# Altium PCB AntennaPCB.PcbDoc
Units mm, origin at the board's own origin, x right, y up, seen from the top; angles counter-clockwise.
Board outline 70 x 70 mm, 4 copper layers (Top Layer, Int1 (GND), Int2 (PWR), Bottom Layer), stack 1.369 mm thick; 20 components, 9 nets, 59 pads, 345 vias.
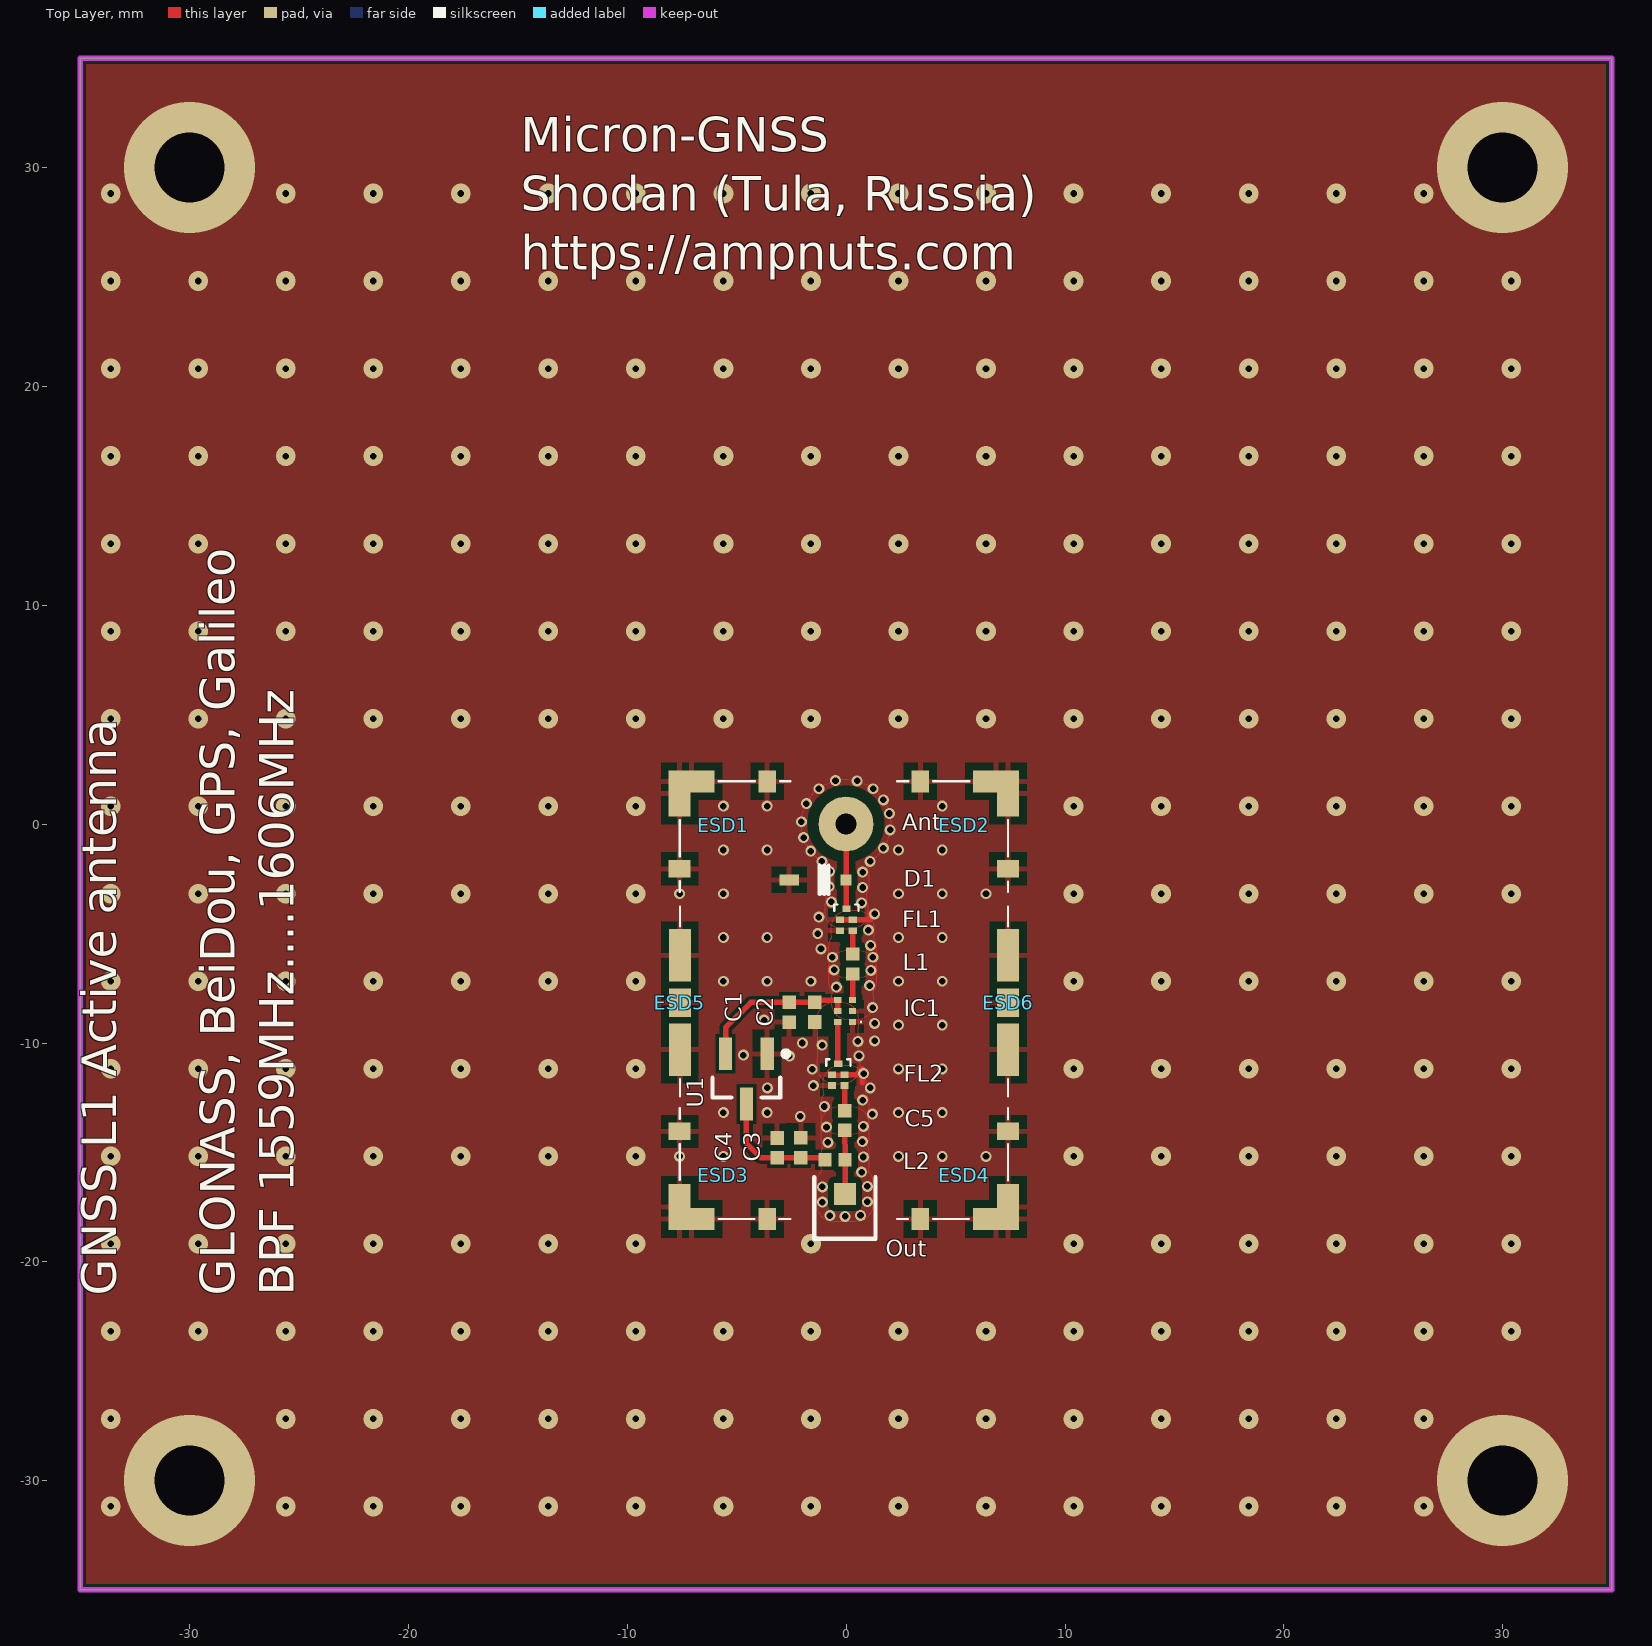
[diagram p0: Top Layer view]
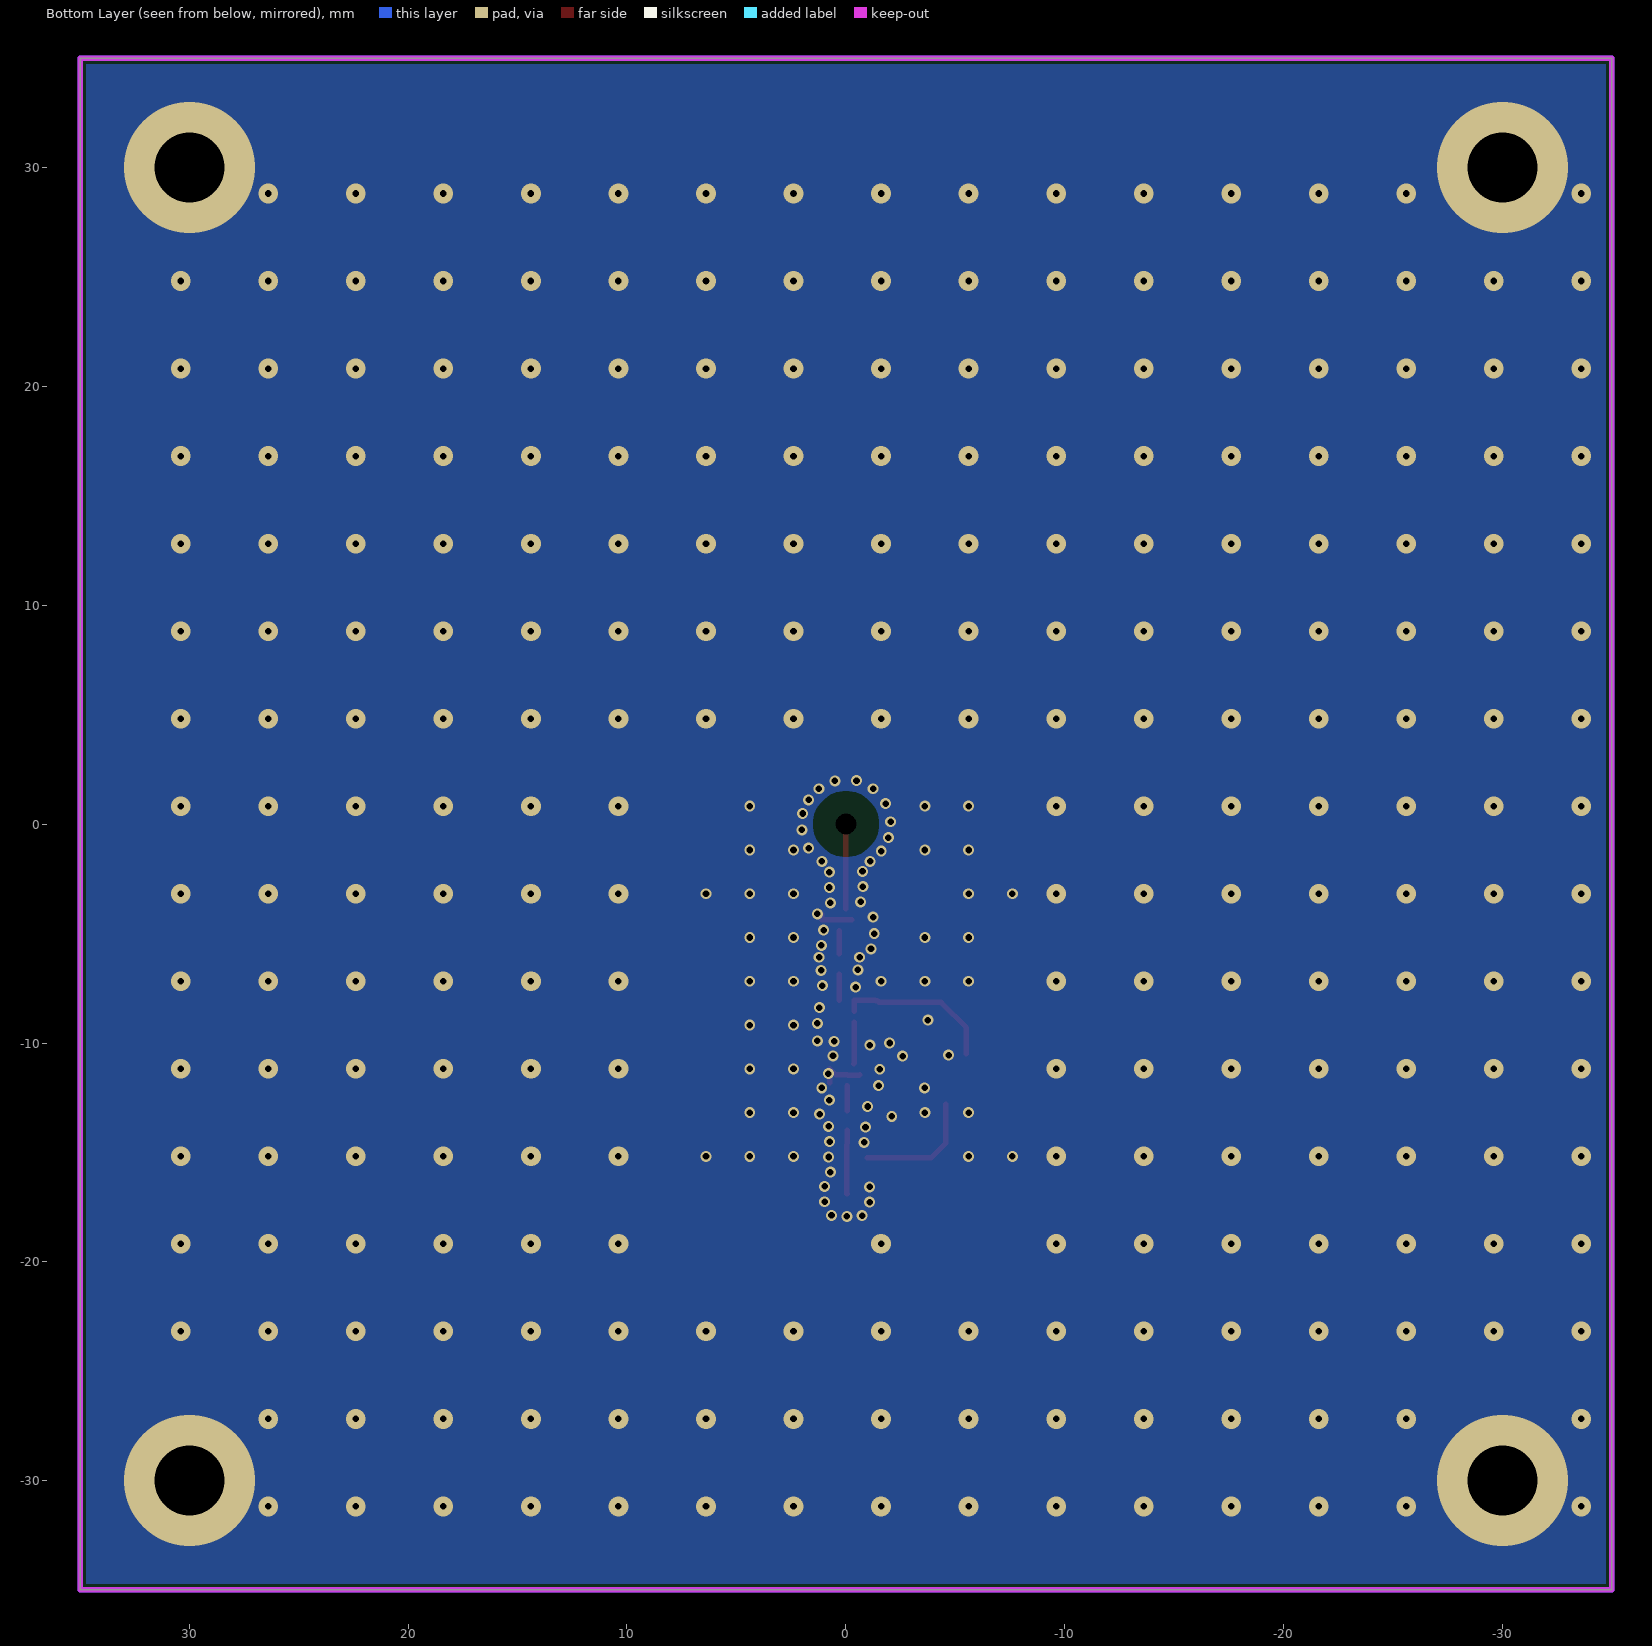
[diagram p1: Bottom Layer view, seen from below]
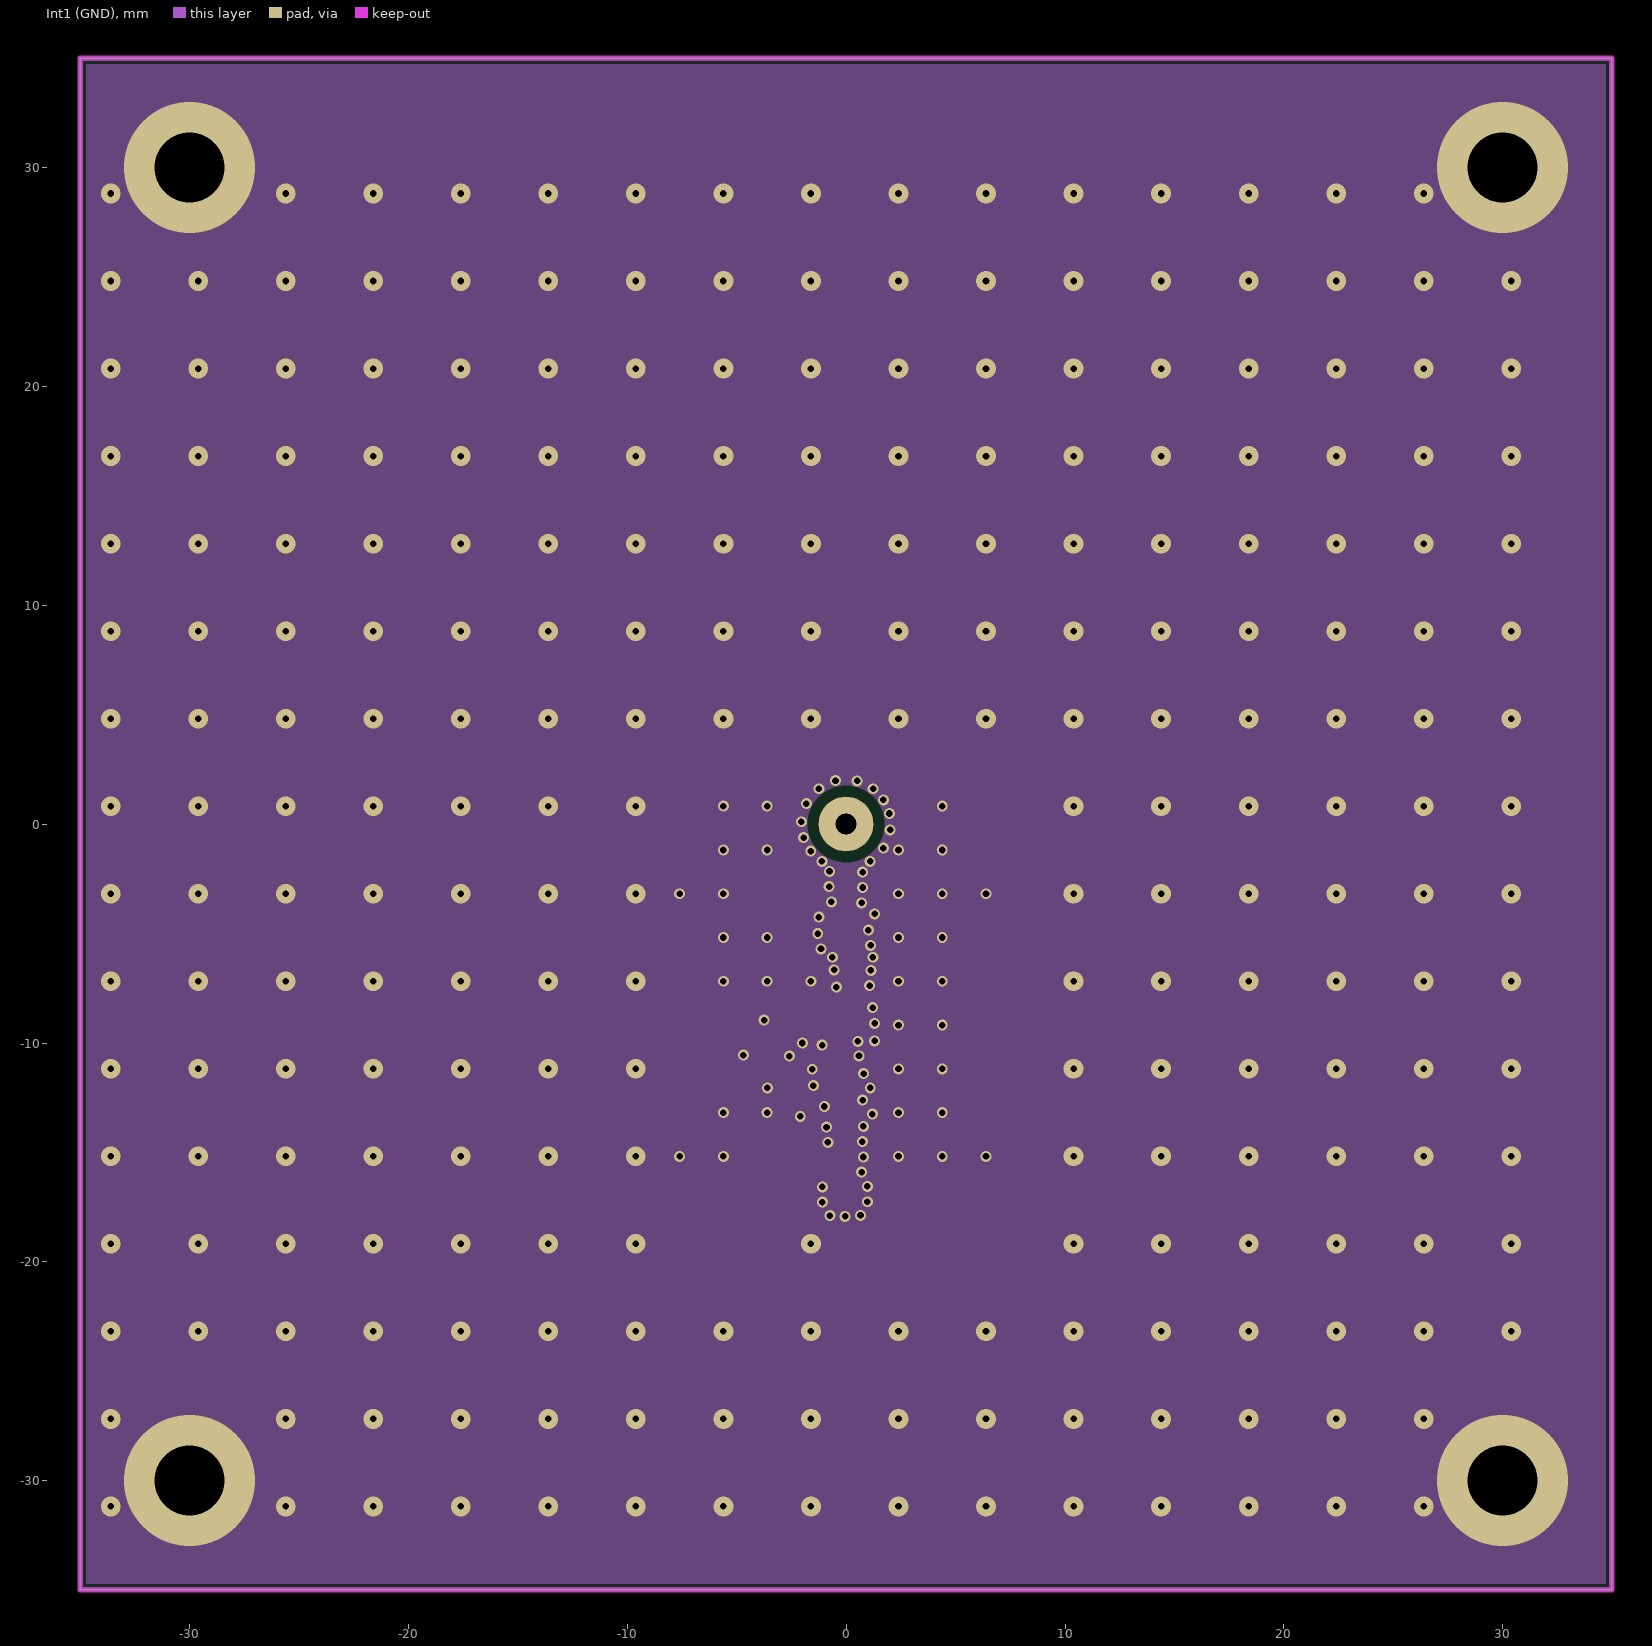
[diagram p2: Int1 (GND)]
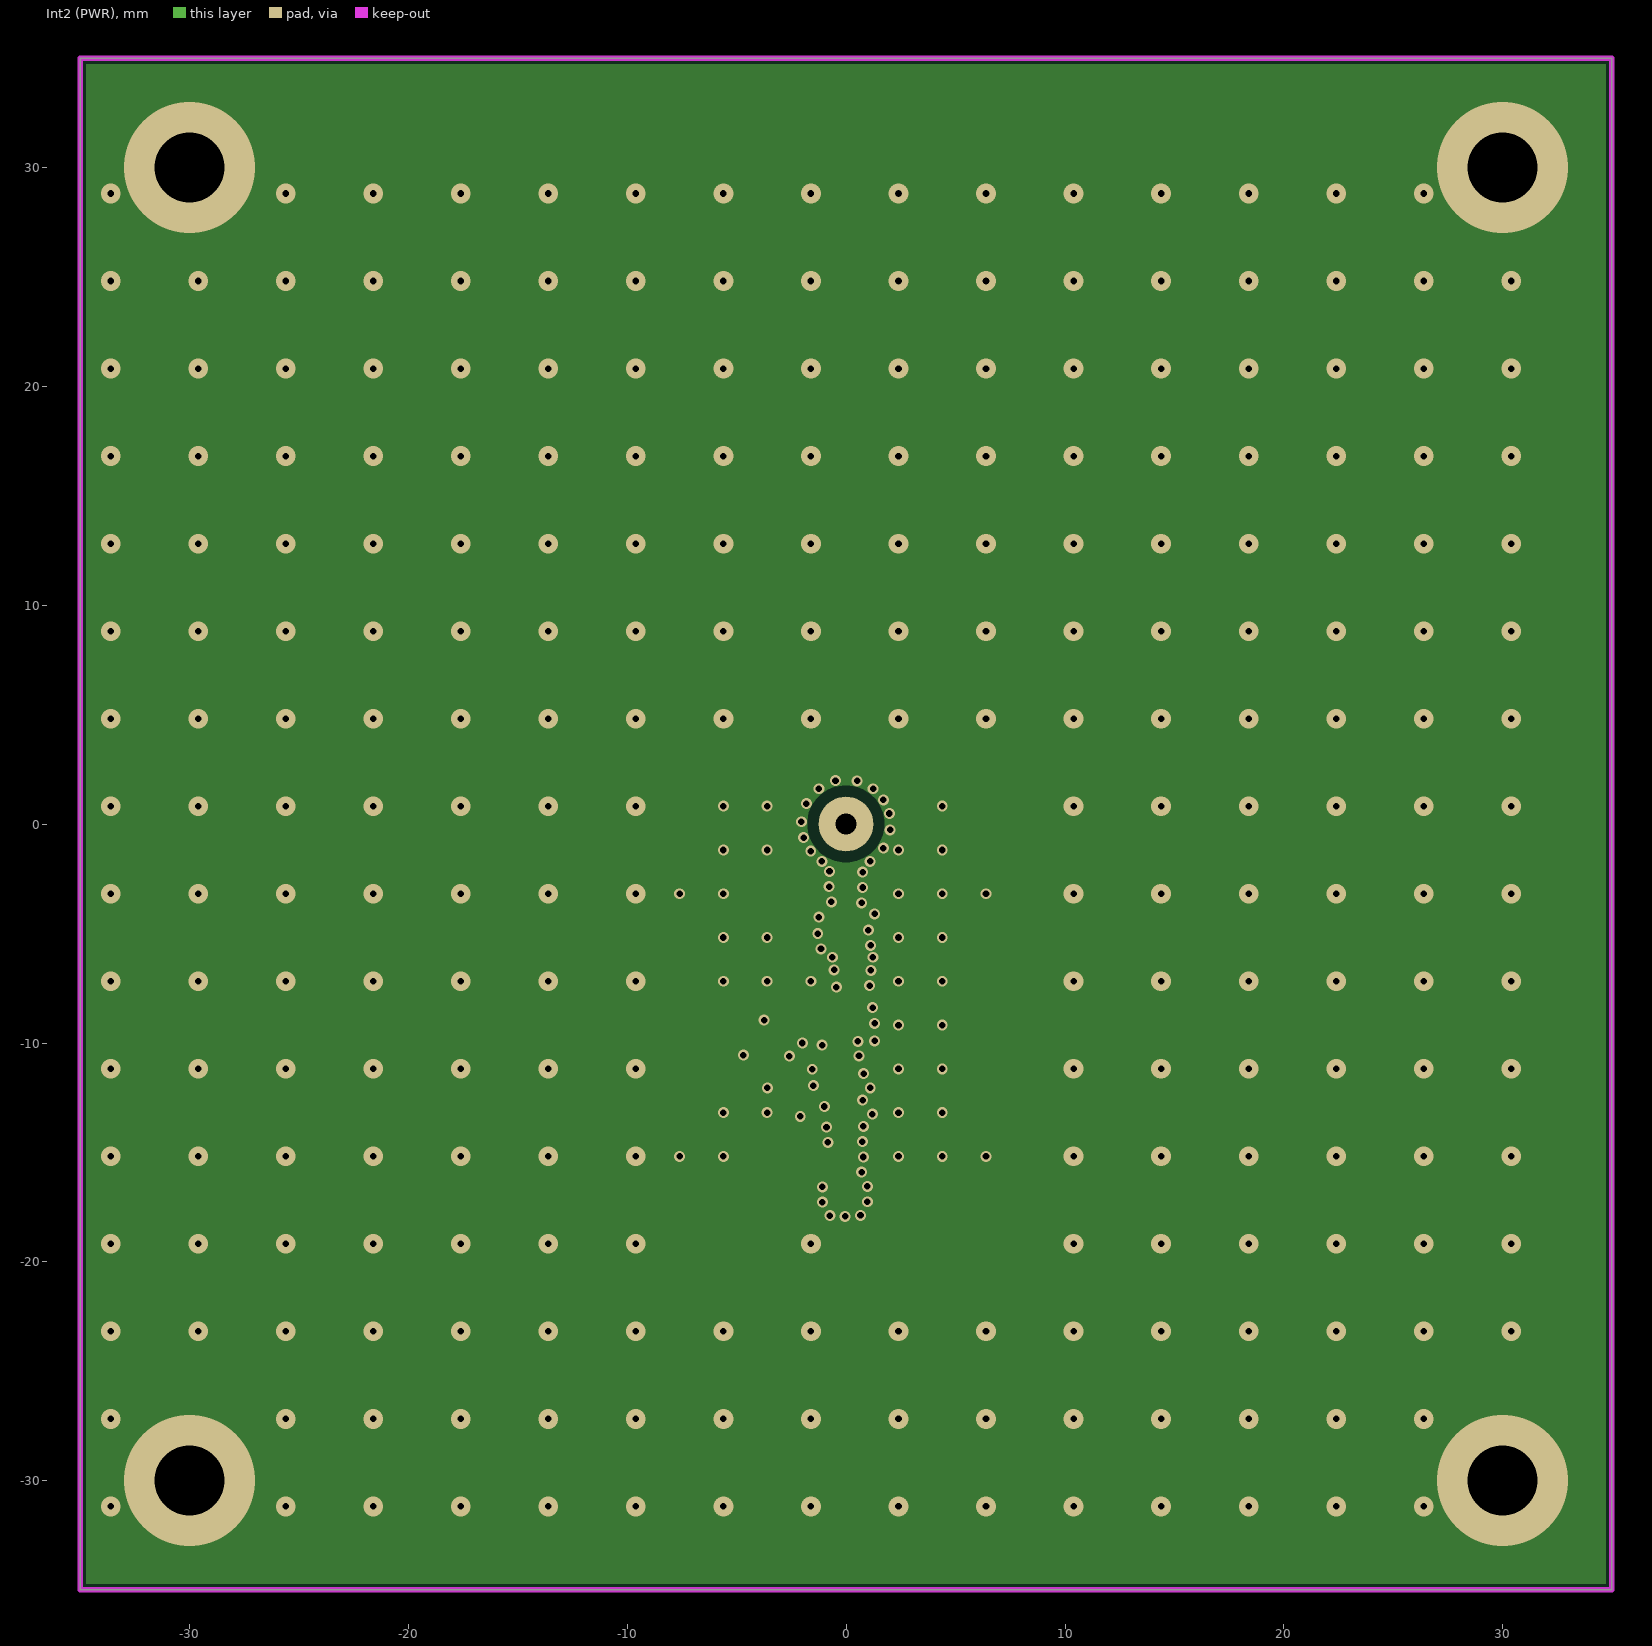
[diagram p3: Int2 (PWR)]
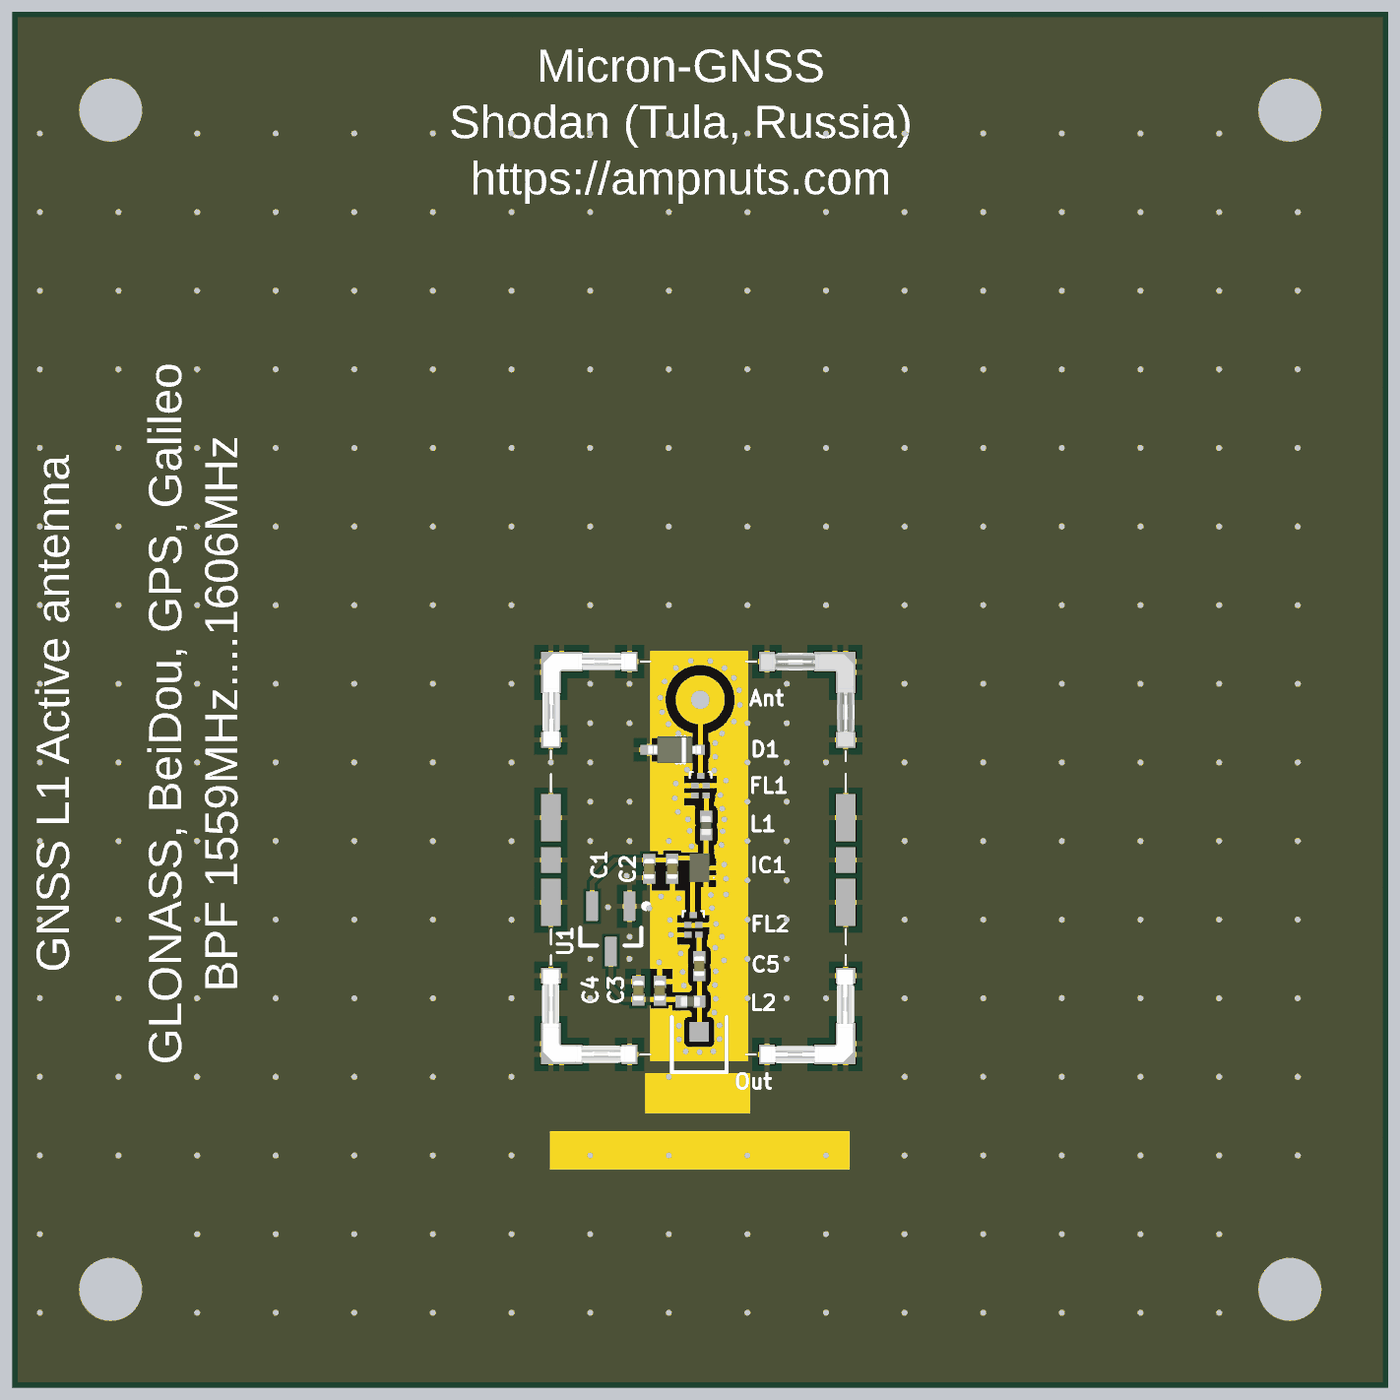
[diagram p4: 3D render of the assembled board from above, using the file's embedded part models]

## Layer stack, top to bottom
Top Solder: solder mask 0.0254, SM-001, Dk 4
Top Layer: signal copper 0.035
Dielectric 1: prepreg 0.1295, PP-017, Dk 4.3
Dielectric 2: prepreg 0.1295, PP-017, Dk 4.3
Int1 (GND): signal copper 0.035
Dielectric 3: core 0.7112, Core-039, Dk 4.8
Int2 (PWR): signal copper 0.035
Dielectric 4: prepreg 0.1295, PP-017, Dk 4.3
Dielectric 5: prepreg 0.1295, PP-017, Dk 4.3
Bottom Layer: signal copper 0.035
Bottom Solder: solder mask 0.0254, SM-001, Dk 4

## Board outline
-35.008,-34.991 -35.008,35.008 34.992,35.008 34.992,-34.991

## Design rules (kind name [scope] priority, off if disabled: settings)
Clearance [All] p1: gap=0.15 ignorepadtopadclearanceinfootprint=FALSE
HoleSize [All] p1: absolutevalues=TRUE maxlimit=4.54 minlimit=0.3 maxpercent=80.000 minpercent=20.000
HoleToHoleClearance [All] p1: gap=0.2 allowstackedmicrovias=TRUE
PolygonConnect [All] p1: thpad.connectstyle=Direct thpad.reliefconductorwidth=0.25 thpad.reliefentries=4 thpad.polygonreliefangle="90 Angle" thpad.airgapwidth=0.35 smdpad.connectstyle=Relief smdpad.reliefconductorwidth=0.25 smdpad.reliefentries=4 smdpad.polygonreliefangle="90 Angle" smdpad.airgapwidth=0.35 via.connectstyle=Direct via.reliefconductorwidth=0.25 via.reliefentries=4 via.polygonreliefangle="90 Angle" via.airgapwidth=0.35
RoutingVias [All] p1: holewidth=0.711 width=1.27 viastyle="Through Hole" minholewidth=0.711 minwidth=1.27 maxholewidth=0.711 maxwidth=1.27
SilkToSilkClearance [All] p1: silktosilkclearance=0.1
SilkToSolderMaskClearance [IsPad] p1: minsilkscreentomaskgap=0.1 clearancetoexposedcopper=TRUE
SolderMaskExpansion [All] p1: expansion=0.05 istentingtop=FALSE
Width [All] p1: maxlimit=0.3 minlimit=0.2 preferedwidth=0.25
26 further rules are at their usual default settings.

## Components (designator, comment, footprint, x,y, rotation, side; value= is the part's Value field where it differs from the comment)
Ant "Taoglas CGGBP.35.2.A.08 (35x35x2mm)" PIN1#1 -0.135,-0.881 r0 top
C1 "1uF" CAPC1005X55N -2.608,-8.592 r90 top
C2 "1nF" CAPC1005X55N -1.432,-8.591 r90 top
C3 "1uF" CAPC1005X55N -2.071,-14.788 r270 top
C4 "1nF" CAPC1005X55N -3.158,-14.792 r270 top
C5 "22pF" CAPC1005X55N -0.058,-13.542 r270 top
D1 "ESD9R3.3S" SOD2512X110N -1.308,-2.542 r180 top
ESD1 "Harwin Clips" "HARWIN - S0981-46R - CLIP" -8.109,2.458 r270 top locked
ESD2 "Harwin Clips" "HARWIN - S0981-46R - CLIP" 7.892,2.458 r180 top locked
ESD3 "Harwin Clips" "HARWIN - S0981-46R - CLIP" -8.108,-18.542 r0 top locked
ESD4 "Harwin Clips" "HARWIN - S0981-46R - CLIP" 7.892,-18.542 r90 top locked
ESD5 "Harwin Clips" "HARWIN - S0991-46R - CLIP" -7.6,-8.15 r90 top
ESD6 "Harwin Clips" "HARWIN - S0991-46R - CLIP" 7.4,-8.15 r90 top
FL1 "B39162B4327P810" B39921B4344P810 0.009,-4.365 r270 top
FL2 "B39162B4327P810" B39921B4344P810 -0.358,-11.442 r270 top
IC1 "BGU7005,115" SL3S1013FTB0115 -0.046,-8.541 r90 top
L1 "5.6nH" INDC1005X55N 0.292,-6.392 r270 top
L2 "1uH" INDC1005X55N -0.508,-15.342 r180 top
Out "direct cable soldering" PIN1#2 -0.058,-17.542 r0 top
U1 "MCP1702T-2502E/CB" SOT-23A-CB3_N -4.558,-11.642 r270 top

## Footprints (in the part's own frame and the unit in brackets; to place one, negate y for a bottom-side part, rotate by r counter-clockwise, add the part's x,y. Pads: shape width x height; smd on the part's side, far side on the other; paste and mask are expansions set on the pad)
B39921B4344P810 [mm]
  rect 0.3x0.375 smd mask+0.05: 1(-0.5,0) 2(0,-0.287) 3(0.5,-0.287) 4(0.5,0.287) 5(0,0.287)
  silkscreen extent -0.7,-0.55 -0.4,0.55
CAPC1005X55N [mm] "Chip Capacitor, Body 1.0x0.55mm, IPC Medium Density"
  rect 0.62x0.62 smd: 1(-0.45,0) 2(0.45,0)
  body extent -0.52,-0.27 0.53,0.28, height 0.55
"HARWIN - S0981-46R - CLIP" [mm]
  rect 1x0.8 smd: 1(0.5,4.5)
  rect 1x2.1 smd: 1(0.5,1.05)
  rect 2.1x1 smd: 1(1.05,0.5)
  rect 0.8x1 smd: 1(4.5,0.5)
  silkscreen extent 0.5,0.5 5.56,5.56, body extent 0.05,0.07 4.81,4.83, height 1.35
"HARWIN - S0991-46R - CLIP" [mm]
  rect 2.4x1 smd: 1(-2.15,0) 1(2.15,0)
  rect 1.3x1 smd: 1(0,0)
  silkscreen extent -4.29,0 4.38,0, body extent -3.24,-0.4 3.26,0.4, height 1.28
INDC1005X55N [mm] "Chip Inductor, 2-Leads, EIA 0402, Metric 1005, Body 1x0.5mm, 0402IPC Medium Density"
  rect 0.6x0.62 smd: 1(-0.46,0) 2(0.46,0)
  body extent -0.52,-0.27 0.53,0.28, height 0.55
PIN1#1 [mm] "Generic Antenna; 1 Lead"
  round 2.5 / inner round 2.5 / far side round 0 hole 0.95: 1(0.127,0.889)
PIN1#2 [mm] "Connector; Plug"
  rect 1x1 smd: 1(0,0.65)
  silkscreen extent -1.4,-1.4 1.4,1.4
SL3S1013FTB0115 [mm]
  rect 0.27x0.325 smd: 1(-0.5,-0.338) 2(0,-0.338) 3(0.5,-0.338) 4(0.5,0.338) 5(0,0.338) 6(-0.5,0.338)
  silkscreen extent -0.52,-0.75 -0.48,-0.7, body extent -0.72,-0.5 0.72,0.5, height 0.6
SOD2512X110N [mm] "Small Outline Diode Flat Lead (SOD-323), 1.70mm W X 1.25mm L X 1.10mm H body,  IPC Medium Density"
  rect 0.5x0.5 smd: 1(-1.3,0)
  rect 0.9x0.5 smd: 2(1.3,0)
  silkscreen extent -0.5,-0.65 -0.1,0.65, body extent -1.35,-0.67 1.35,0.68, height 1.1
SOT-23A-CB3_N [mm] "SOT346, 3-Leads, Body 2.9x1.5mm, Pitch 0.95mm, Lead Span 2.6mm, IPC Medium Density"
  rect 1.5x0.6 smd: 1(-1.15,0.95) 2(-1.15,-0.95) 3(1.15,0)
  silkscreen extent -1.27,-1.55 0.85,1.93, body extent -0.85,-1.55 0.85,1.55, height 1.45

## Part data
Ant: library part Antenna, "Generic Antenna", LatestRevisionDate=17-Jul-2002, LatestRevisionNote="Re-released for DXP Platform.", PackageReference=PIN1, Published=24-Mar-1999, Publisher="Altium Limited"
C1 C2 C3 C4 C5: library part CC0402_10NF_50V_10%_X7R, "Non-polarised capacitor", Case=0402, Manufacturer=GENERIC, Manufacturer1 ComponentHeight=0.55mm, Manufacturer1 Example=MURATA, Manufacturer1 Part Number=GRM155R71H103KA88D, Tolerance=±10%, Voltage=50V, Author="CERN DEM MR", Component Type=Standard, CreateDate=08.01.2016, HelpURL=\\cern.ch\dfs\Applications\Altium\Datasheets\CC0402_X7R_MURATA_GRM.pdf, LatestRevisionDate=08.01.2016, Manufacturer Part Number=CC0402_10NF_50V_10%_X7R, Mounted=Yes, Part Description="SMD Multilayer Chip Ceramic Capacitor", Part Number=CC0402_10NF_50V_10%_X7R, Pin Count=2, Sense=No, SMD=Yes, Socket=No, Status=None, TC=X7R
D1: library part PESD5V0S1UA, "Transient Voltage Suppressor Diode (Uni-Directional)", Case=SOD323, Manufacturer="NXP SEMICONDUCTORS", Power=890W, Voltage=5V, Author="CERN DEM JLC", Bonding=No, Component Type=Standard, ComponentHeight=1.1mm, CreateDate=28.08.2012, Device=ESD9R3.3S, HelpURL=\\cern.ch\dfs\Applications\Altium\Datasheets\PESD5V0S1UA.pdf, LatestRevisionDate=18.09.2013, Manufacturer Part Number=PESD5V0S1UA, Mounted=Yes, PackageDescription="Small Outline Diode Flat Lead (SOD-323), 1.70mm W X 1.25mm L X 1.10mm H body,  IPC Medium Density", Part Description="Unidirectional ESD Protection for Transient Voltage Suppression", Part Number=PESD5V0S1UA, Pin Count=2, PressFit=No, Sense=No, SMD=Yes, Socket=No
FL1 FL2: "Filter", Manufacturer_Name=TDK, Mouser Part Number=N/A, Datasheet Link=https://static6.arrow.com/aropdfconversion/457160cdcba5f1770f035cca3bb9ee2755d7a371/171b4327.pdf, Manufacturer_Part_Number=B39162B4327P810, Mouser Price/Stock=https://www.mouser.co.uk/ProductDetail/TDK/B39162B4327P810?qs=hUXy7GzqLWzEDXeMvC1aGg%3D%3D
IC1: "Integrated Circuit", Manufacturer_Name=NXP, Mouser Part Number=771-BGU7005115, Arrow Part Number=BGU7005,115, Arrow Price/Stock=https://www.arrow.com/en/products/bgu7005115/nxp-semiconductors, Datasheet Link=http://www.nxp.com/docs/en/data-sheet/BGU7005.pdf, Height=0.5mm, Manufacturer_Part_Number=BGU7005,115, Mouser Price/Stock=https://www.mouser.co.uk/ProductDetail/NXP-Semiconductors/BGU7005115?qs=2NzsBjR%252BRRlSWzh3ohfbQQ%3D%3D
L1 L2: library part IND0402_MURATA_BLM15HD601SN1, "Inductor", Case=0402, Manufacturer=MURATA, Manufacturer Part Number=BLM15HD601SN1D, Power=300mA, Resistance=0.85R, Tolerance=±25%, Author="CERN DEM JLC", Component Type=Standard, ComponentHeight=0.55mm, CreateDate=28.02.2012, HelpURL=\\cern.ch\dfs\Applications\Altium\Datasheets\IND0402_MURATA_BLM15H.pdf, LatestRevisionDate=28.02.2012, Mounted=Yes, Part Description="SMD EMIFIL Suppression Chip Ferrite Bead", Part Number=IND0402_MURATA_BLM15HD601SN1, Pin Count=2, Sense=No, SMD=Yes, Socket=No, Status=None
Out: library part Socket, LatestRevisionDate=17-Jul-2002, LatestRevisionNote="Re-released for DXP Platform.", Publisher="Altium Limited"
U1: "250 mA Low Quiescent Current LDO Regulator, 3-Pin SOT-23A, Extended Temperature, Tape and Reel", Supplier Part Number 1=MCP1702T-2502E/CBTR-ND, ComponentLink1Description=Datasheet, ComponentLink1URL=http://ww1.microchip.com/downloads/en/DeviceDoc/22008d.pdf, ComponentLink2Description="Packaging Specification", ComponentLink2URL=http://www.microchip.com/stellent/groups/techpub_sg/documents/packagingspec/en012702.pdf, ComponentLink3Description="Microchip.com Home", ComponentLink3URL=http://www.microchip.com/, DatasheetVersion="revD, Jun-2009", LatestRevisionDate=02-Dec-2009, LatestRevisionNote="Updated to datasheet revision D, Jun-2009", PackageDescription="3-Lead Plastic Small Outline Transistor (CB) [SOT-23A]", PackageReference=SOT-23A-CB3, PackageVersion="revBB, Aug-2009", Published=29-Jan-2009, Publisher="Altium Limited", Supplier 1=Digi-Key, Supplier 2=Digi-Key, Supplier 3=Digi-Key, Supplier 4=Farnell, Supplier Part Number 2=MCP1702T-2502E/CBCT-ND, Supplier Part Number 3=MCP1702T-2502E/CBDKR-ND, Supplier Part Number 4=1627173
ESD1 ESD2 ESD3 ESD4 ESD5 ESD6: Order=S0981-46R

## Via types
v1: diameter 0.9, hole 0.3, Top Layer to Bottom Layer, tented both sides, 243 vias
v2: diameter 0.5, hole 0.3, Top Layer to Bottom Layer, tented bottom, 60 vias
v3: diameter 0.5, hole 0.3, Top Layer to Bottom Layer, tented both sides, 38 vias
v4: diameter 6, hole 3.2, Top Layer to Bottom Layer, tented bottom, 4 vias

## Nets (pads, with @x,y where several pads share a name; then routed paths per layer and width w, separated by ;. In a path a pad name is that pad's centre, name@x,y a point inside that pad or via, vN(x,y) a via of type N, cw(c..) or ccw(c..) an arc to the next point about the centre after c; other vN are vias at no path point)
2.5V: C1.2 C2.2 IC1.4 IC1.5 U1.2 | length 7.3
  Top Layer w0.25: U1.2 -5.508,-9.292 -4.359,-8.142 C1.2 -2.607,-8.141 -1.532,-8.141 cw(c-1.293,-8.38) -1.293,-8.042 IC1.4 IC1.5
3.3V-5V: C3.2 C4.2 L2.2 U1.3 | length 5.7
  Top Layer w0.25: U1.3 -4.558,-14.591 -3.908,-15.242 C4.2 L2.2@-0.968,-15.242
GND: C1.1 C2.1 C3.1 C4.1 D1.2 ESD1.1 ESD2.1 ESD3.1 ESD4.1 ESD5.1 ESD6.1 FL1.2 FL1.3 FL1.5 FL2.2 FL2.3 FL2.5 IC1.1 IC1.2 U1.1 | length 3.8
  Top Layer w0.25: FL2.2 -0.623,-11.464 -0.094,-11.464 FL2.5 0.464,-11.442 0.724,-11.182 0.726,-11.182 0.728,-11.184 0.728,-11.816 ; FL1.2 FL1.5 1.093,-4.365 v2@1.093,-4.105
  other v1: -33.61,-31.179 -25.61,-31.179 -21.61,-31.179 -17.61,-31.179 -13.61,-31.179 -9.61,-31.179 -5.61,-31.179 -1.61,-31.179 2.39,-31.179 6.39,-31.179 10.39,-31.179 14.39,-31.179 18.39,-31.179 22.39,-31.179 26.39,-31.179 -33.61,-27.179 -25.61,-27.179 -21.61,-27.179 -17.61,-27.179 -13.61,-27.179 -9.61,-27.179 -5.61,-27.179 -1.61,-27.179 2.39,-27.179 6.39,-27.179 10.39,-27.179 14.39,-27.179 18.39,-27.179 22.39,-27.179 26.39,-27.179 -33.61,-23.179 -29.61,-23.179 -25.61,-23.179 -21.61,-23.179 -17.61,-23.179 -13.61,-23.179 -9.61,-23.179 -5.61,-23.179 -1.61,-23.179 2.39,-23.179 6.39,-23.179 10.39,-23.179 14.39,-23.179 18.39,-23.179 22.39,-23.179 26.39,-23.179 30.39,-23.179 -33.61,-19.179 -29.61,-19.179 -25.61,-19.179 -21.61,-19.179 -17.61,-19.179 -13.61,-19.179 -9.61,-19.179 -1.61,-19.179 10.39,-19.179 14.39,-19.179 18.39,-19.179 22.39,-19.179 26.39,-19.179 30.39,-19.179 -33.61,-15.179 -29.61,-15.179 -25.61,-15.179 -21.61,-15.179 -17.61,-15.179 -13.61,-15.179 -9.61,-15.179 10.39,-15.179 14.39,-15.179 18.39,-15.179 22.39,-15.179 26.39,-15.179 30.39,-15.179 -33.61,-11.179 -29.61,-11.179 -25.61,-11.179 -21.61,-11.179 -17.61,-11.179 -13.61,-11.179 -9.61,-11.179 10.39,-11.179 14.39,-11.179 18.39,-11.179 22.39,-11.179 26.39,-11.179 30.39,-11.179 -33.61,-7.179 -29.61,-7.179 -25.61,-7.179 -21.61,-7.179 -17.61,-7.179 -13.61,-7.179 -9.61,-7.179 10.39,-7.179 14.39,-7.179 18.39,-7.179 22.39,-7.179 26.39,-7.179 30.39,-7.179 -33.61,-3.179 -29.61,-3.179 -25.61,-3.179 -21.61,-3.179 -17.61,-3.179 -13.61,-3.179 -9.61,-3.179 10.39,-3.179 14.39,-3.179 18.39,-3.179 22.39,-3.179 26.39,-3.179 30.39,-3.179 -33.61,0.821 -29.61,0.821 -25.61,0.821 -21.61,0.821 -17.61,0.821 -13.61,0.821 -9.61,0.821 10.39,0.821 14.39,0.821 18.39,0.821 22.39,0.821 26.39,0.821 30.39,0.821 -33.61,4.821 -29.61,4.821 -25.61,4.821 -21.61,4.821 -17.61,4.821 -13.61,4.821 -9.61,4.821 -5.61,4.821 -1.61,4.821 2.39,4.821 6.39,4.821 10.39,4.821 14.39,4.821 18.39,4.821 22.39,4.821 26.39,4.821 30.39,4.821 -33.61,8.821 -29.61,8.821 -25.61,8.821 -21.61,8.821 -17.61,8.821 -13.61,8.821 -9.61,8.821 -5.61,8.821 -1.61,8.821 2.39,8.821 6.39,8.821 10.39,8.821 14.39,8.821 18.39,8.821 22.39,8.821 26.39,8.821 30.39,8.821 -33.61,12.821 -29.61,12.821 -25.61,12.821 -21.61,12.821 -17.61,12.821 -13.61,12.821 -9.61,12.821 -5.61,12.821 -1.61,12.821 2.39,12.821 6.39,12.821 10.39,12.821 14.39,12.821 18.39,12.821 22.39,12.821 26.39,12.821 30.39,12.821 -33.61,16.821 -29.61,16.821 -25.61,16.821 -21.61,16.821 -17.61,16.821 -13.61,16.821 -9.61,16.821 -5.61,16.821 -1.61,16.821 2.39,16.821 6.39,16.821 10.39,16.821 14.39,16.821 18.39,16.821 22.39,16.821 26.39,16.821 30.39,16.821 -33.61,20.821 -29.61,20.821 -25.61,20.821 -21.61,20.821 -17.61,20.821 -13.61,20.821 -9.61,20.821 -5.61,20.821 -1.61,20.821 2.39,20.821 6.39,20.821 10.39,20.821 14.39,20.821 18.39,20.821 22.39,20.821 26.39,20.821 30.39,20.821 -33.61,24.821 -29.61,24.821 -25.61,24.821 -21.61,24.821 -17.61,24.821 -13.61,24.821 -9.61,24.821 -5.61,24.821 -1.61,24.821 2.39,24.821 6.39,24.821 10.39,24.821 14.39,24.821 18.39,24.821 22.39,24.821 26.39,24.821 30.39,24.821 -33.61,28.821 -25.61,28.821 -21.61,28.821 -17.61,28.821 -13.61,28.821 -9.61,28.821 -5.61,28.821 -1.61,28.821 2.39,28.821 6.39,28.821 10.39,28.821 14.39,28.821 18.39,28.821 22.39,28.821 26.39,28.821
  other v2: -0.046,-17.922 -0.745,-17.885 0.653,-17.876 -1.089,-17.275 0.972,-17.252 -1.089,-16.575 0.972,-16.552 0.708,-15.904 0.782,-15.208 -0.836,-14.538 0.738,-14.509 -0.899,-13.841 0.782,-13.81 -2.1,-13.35 1.2,-13.25 -1,-12.9 0.748,-12.613 1.1,-12.05 -1.5,-11.95 0.793,-11.401 -1.55,-11.2 0.584,-10.589 -1.1,-10.1 -2,-10 0.533,-9.922 1.3,-9.9 1.3,-9.1 1.209,-8.379 -0.45,-7.45 1.075,-7.378 1.132,-6.68 -0.549,-6.655 -0.633,-6.08 1.216,-6.08 -1.15,-5.7 1.113,-5.536 -1.3,-5 1.013,-4.843 -1.25,-4.25 1.3,-4.1 0.702,-3.592 -0.676,-3.549 0.751,-2.894 -0.776,-2.856 0.752,-2.194 -0.762,-2.156 -1.115,-1.704 1.098,-1.704 -1.62,-1.228 1.704,-1.098 -1.949,-0.617 2.006,-0.257 -2.044,0.111 1.97,0.49 -1.823,0.938 1.704,1.115 -1.245,1.62 1.228,1.62 -0.49,1.987 0.503,1.979
  other v3: -7.609,-15.178 -5.609,-15.178 2.391,-15.178 4.391,-15.178 6.391,-15.178 -5.609,-13.178 -3.609,-13.178 2.391,-13.178 4.391,-13.178 -3.6,-12.05 2.391,-11.178 4.391,-11.178 -2.6,-10.6 -4.7,-10.55 2.391,-9.178 4.391,-9.178 -3.75,-8.95 -5.609,-7.178 -3.609,-7.178 -1.609,-7.178 2.391,-7.178 4.391,-7.178 -5.609,-5.178 -3.609,-5.178 2.391,-5.178 4.391,-5.178 -7.609,-3.178 -5.609,-3.178 2.391,-3.178 4.391,-3.178 6.391,-3.178 -5.609,-1.178 -3.609,-1.178 2.391,-1.178 4.391,-1.178 -5.609,0.822 -3.609,0.822 4.391,0.822
  other v4: -30.008,-29.992 29.992,-29.992 -30.008,30.008 29.992,30.008
NetAnt_1: Ant.1 D1.1 FL1.1 | length 3.9
  Top Layer w0.25: Ant.1 0,0 0,-3.856 FL1.1
NetC5_1: C5.1 FL2.4 | length 1.2
  Top Layer w0.25: FL2.4 -0.065,-11.948 -0.065,-13.085 C5.1
NetC5_2: C5.2 L2.1 Out.1 | length 2.8
  Top Layer w0.25: Out.1 -0.048,-16.892 L2.1 ; C5.2 L2.1@-0.038,-15.241
NetFL1_4: FL1.4 L1.1 | length 1.1
  Top Layer w0.25: L1.1 0.293,-5.93 0.293,-4.867 FL1.4
NetFL2_1: FL2.1 IC1.6 | length 1.9
  Top Layer w0.25: IC1.6 -0.385,-10.917 FL2.1
NetIC1_3: IC1.3 L1.2 | length 1.2
  Top Layer w0.25: IC1.3 L1.2
copper on no net: | length 280
  Bottom Layer w0.254: -35.008,-34.991 34.992,-34.991 34.992,35.008 -35.008,35.008 -35.008,-34.991

## Polygon pours and split planes (outlines as drawn)
GND on Top Layer (solid, pour order 23): 155 vertices, not listed, extent -2.044,-4.796 2.027,2.044
GND on Top Layer (solid, pour order 22): 0.685,-3.959 0.874,-4.037 1.036,-4.162 1.16,-4.324 1.238,-4.512 1.265,-4.715 1.265,-5.015 1.241,-5.192 1.279,-5.241 1.357,-5.429 1.383,-5.632 1.383,-6.232 1.357,-6.434 1.279,-6.622 1.154,-6.784 0.992,-6.909 0.804,-6.987 0.601,-7.013 -0.018,-7.013 -0.221,-6.987 -0.409,-6.909 -0.571,-6.784 -0.696,-6.622 -0.774,-6.434 -0.8,-6.232 -0.8,-5.632 -0.774,-5.429 -0.696,-5.241 -0.652,-5.183 -0.674,-5.015 -0.674,-4.715 -0.647,-4.512 -0.569,-4.324 -0.445,-4.162 -0.283,-4.037 -0.094,-3.959 0.108,-3.933 0.483,-3.933
GND on Top Layer (solid, pour order 21): -0.02,-8.151 0.169,-8.229 0.331,-8.354 0.455,-8.516 0.533,-8.704 0.56,-8.906 0.56,-9.176 0.533,-9.379 0.533,-9.38 0.533,-10.465 0.584,-10.589 0.611,-10.792 0.611,-11.092 0.584,-11.294 0.506,-11.482 0.382,-11.644 0.22,-11.769 0.031,-11.847 -0.171,-11.873 -0.546,-11.873 -0.748,-11.847 -0.937,-11.769 -1.099,-11.644 -1.223,-11.482 -1.301,-11.294 -1.328,-11.092 -1.328,-10.792 -1.302,-10.592 -1.302,-9.38 -1.302,-9.379 -1.329,-9.176 -1.329,-8.906 -1.302,-8.704 -1.224,-8.516 -1.1,-8.354 -0.938,-8.229 -0.749,-8.151 -0.547,-8.125 -0.222,-8.125
GND on Top Layer (solid, pour order 20): 0.454,-12.926 0.642,-13.004 0.804,-13.129 0.929,-13.291 1.007,-13.479 1.033,-13.682 1.033,-14.302 1.007,-14.504 0.939,-14.667 1.007,-14.829 1.033,-15.032 1.033,-15.652 1.007,-15.854 1.006,-15.854 1.119,-16.001 1.197,-16.189 1.223,-16.392 1.223,-17.391 1.197,-17.594 1.119,-17.782 0.994,-17.944 0.832,-18.069 0.644,-18.147 0.442,-18.173 -0.558,-18.173 -0.761,-18.147 -0.949,-18.069 -1.111,-17.944 -1.236,-17.782 -1.314,-17.594 -1.34,-17.391 -1.34,-16.392 -1.314,-16.189 -1.236,-16.001 -1.111,-15.839 -1.106,-15.835 -1.13,-15.652 -1.13,-15.032 -1.104,-14.829 -1.046,-14.691 -1.124,-14.504 -1.15,-14.302 -1.15,-13.682 -1.124,-13.479 -1.046,-13.291 -0.921,-13.129 -0.759,-13.004 -0.571,-12.926 -0.368,-12.9 0.252,-12.9
GND on Top Layer (solid, pour order 19): 0.318,-11.036 0.507,-11.114 0.669,-11.239 0.793,-11.401 0.871,-11.589 0.898,-11.792 0.898,-12.091 0.871,-12.294 0.865,-12.308 0.929,-12.391 1.007,-12.579 1.033,-12.782 1.033,-13.402 1.007,-13.604 0.929,-13.792 0.804,-13.954 0.642,-14.079 0.454,-14.157 0.252,-14.183 -0.368,-14.183 -0.571,-14.157 -0.759,-14.079 -0.921,-13.954 -1.046,-13.792 -1.124,-13.604 -1.15,-13.402 -1.15,-12.782 -1.124,-12.579 -1.046,-12.391 -0.999,-12.33 -1.014,-12.294 -1.041,-12.091 -1.041,-11.792 -1.014,-11.589 -0.936,-11.401 -0.812,-11.239 -0.65,-11.114 -0.461,-11.036 -0.259,-11.01 0.116,-11.01
GND on Top Layer (solid, pour order 18): 0.804,-5.796 0.992,-5.874 1.154,-5.999 1.279,-6.161 1.357,-6.349 1.383,-6.552 1.383,-7.151 1.357,-7.354 1.279,-7.542 1.209,-7.634 1.209,-7.703 1.209,-7.704 1.236,-7.907 1.236,-8.176 1.209,-8.379 1.131,-8.567 1.007,-8.729 0.845,-8.854 0.656,-8.932 0.454,-8.958 0.129,-8.958 -0.073,-8.932 -0.262,-8.854 -0.424,-8.729 -0.548,-8.567 -0.626,-8.379 -0.653,-8.176 -0.653,-7.907 -0.626,-7.704 -0.626,-7.703 -0.626,-7.634 -0.696,-7.542 -0.774,-7.354 -0.8,-7.151 -0.8,-6.552 -0.774,-6.349 -0.696,-6.161 -0.571,-5.999 -0.409,-5.874 -0.221,-5.796 -0.018,-5.77 0.601,-5.77
GND on Top Layer "GND_L01_P000" (solid, pour order 0): -35.008,35.008 34.942,35.008 34.942,-34.992 -35.108,-34.992
GND on Bottom Layer "GND_L04_P001" (solid, pour order 1): -35.008,35.008 34.942,35.008 34.942,-34.992 -35.108,-34.992
GND on Int1 (GND) "GND_L02_P015" (solid, pour order 15): -35,34.95 34.95,34.95 34.95,-35.1 -35.05,-35.1
GND on Int2 (PWR) "GND_L03_P016" (solid, pour order 16): -35.2,34.85 34.9,34.85 34.9,-35.25 -35.05,-35.25
no net on Top Solder "NONET_L-01_P-001" (solid): -2.558,2.508 2.442,2.508 2.442,-18.392 -2.558,-18.392

## Keep-outs
Keep-Out Layer:
  the board outline again, w0.254

## Other copper
Top Layer:
  pour cut-out: 0.353,1.494 0.387,1.483 0.421,1.476 0.725,1.35 0.755,1.33 0.786,1.315 1.047,1.114 1.071,1.088 1.097,1.064 1.298,0.803 1.313,0.772 1.333,0.742 1.459,0.438 1.466,0.404 1.477,0.37 1.52,0.044 1.518,0.008 1.52,-0.027 1.477,-0.353 1.466,-0.387 1.459,-0.421 1.333,-0.725 1.313,-0.755 1.298,-0.786 1.097,-1.047 1.071,-1.071 1.047,-1.097 0.786,-1.298 0.755,-1.313 0.725,-1.333 0.421,-1.459 0.405,-1.462 0.405,-2.082 0.432,-2.101 0.491,-2.188 0.512,-2.292 0.512,-2.792 0.491,-2.895 0.432,-2.982 0.405,-3.001 0.405,-3.551 0.446,-3.611 0.466,-3.715 0.466,-4.015 0.446,-4.118 0.387,-4.206 0.299,-4.264 0.196,-4.285 -0.179,-4.285 -0.282,-4.264 -0.37,-4.206 -0.429,-4.118 -0.449,-4.015 -0.449,-3.715 -0.429,-3.611 -0.405,-3.577 -0.405,-3.012 -0.449,-2.982 -0.508,-2.895 -0.529,-2.792 -0.529,-2.292 -0.508,-2.188 -0.449,-2.101 -0.405,-2.071 -0.405,-1.465 -0.438,-1.459 -0.742,-1.333 -0.772,-1.313 -0.803,-1.298 -1.064,-1.097 -1.088,-1.071 -1.114,-1.047 -1.315,-0.786 -1.33,-0.755 -1.35,-0.725 -1.476,-0.421 -1.483,-0.387 -1.494,-0.353 -1.537,-0.027 -1.535,0.008 -1.537,0.044 -1.494,0.37 -1.483,0.404 -1.476,0.438 -1.35,0.742 -1.33,0.772 -1.315,0.803 -1.114,1.064 -1.088,1.088 -1.064,1.114 -0.803,1.315 -0.772,1.33 -0.742,1.35 -0.438,1.476 -0.404,1.483 -0.37,1.494 -0.044,1.537 -0.008,1.535 0.027,1.537
  pour cut-out: 0.586,-4.465 0.674,-4.524 0.733,-4.611 0.753,-4.715 0.753,-5.015 0.733,-5.118 0.699,-5.168 0.699,-5.381 0.705,-5.382 0.792,-5.441 0.851,-5.528 0.872,-5.632 0.872,-6.232 0.851,-6.335 0.792,-6.422 0.705,-6.481 0.601,-6.502 -0.018,-6.502 -0.122,-6.481 -0.209,-6.422 -0.268,-6.335 -0.289,-6.232 -0.289,-5.632 -0.268,-5.528 -0.209,-5.441 -0.122,-5.382 -0.112,-5.38 -0.112,-5.162 -0.142,-5.118 -0.162,-5.015 -0.162,-4.715 -0.142,-4.611 -0.083,-4.524 0.005,-4.465 0.108,-4.444 0.483,-4.444
  pour cut-out: -0.383,-8.636 -0.222,-8.636 -0.119,-8.657 -0.031,-8.716 0.028,-8.803 0.048,-8.906 0.048,-9.176 0.028,-9.28 0.021,-9.29 0.021,-10.602 0.079,-10.688 0.099,-10.792 0.099,-11.092 0.079,-11.195 0.02,-11.282 -0.068,-11.341 -0.171,-11.362 -0.546,-11.362 -0.649,-11.341 -0.737,-11.282 -0.796,-11.195 -0.816,-11.092 -0.816,-10.792 -0.796,-10.688 -0.79,-10.68 -0.79,-9.29 -0.797,-9.28 -0.817,-9.176 -0.817,-8.906 -0.797,-8.803 -0.738,-8.716 -0.65,-8.657 -0.547,-8.636 -0.386,-8.636 -0.385,-8.636 -0.384,-8.636
  pour cut-out: 0.355,-13.432 0.442,-13.491 0.501,-13.578 0.522,-13.682 0.522,-14.302 0.501,-14.405 0.442,-14.492 0.356,-14.55 0.36,-14.785 0.442,-14.841 0.501,-14.928 0.522,-15.032 0.522,-15.652 0.501,-15.755 0.442,-15.842 0.357,-15.9 0.357,-16.121 0.442,-16.121 0.545,-16.142 0.632,-16.201 0.691,-16.288 0.712,-16.392 0.712,-17.391 0.691,-17.495 0.632,-17.582 0.545,-17.641 0.442,-17.662 -0.558,-17.662 -0.662,-17.641 -0.749,-17.582 -0.808,-17.495 -0.829,-17.391 -0.829,-16.392 -0.808,-16.288 -0.749,-16.201 -0.662,-16.142 -0.558,-16.121 -0.454,-16.121 -0.454,-15.9 -0.539,-15.842 -0.598,-15.755 -0.619,-15.652 -0.619,-15.032 -0.598,-14.928 -0.539,-14.841 -0.452,-14.782 -0.451,-14.782 -0.455,-14.554 -0.472,-14.551 -0.559,-14.492 -0.618,-14.405 -0.639,-14.302 -0.639,-13.682 -0.618,-13.578 -0.559,-13.491 -0.472,-13.432 -0.368,-13.411 0.252,-13.411
  pour cut-out: 0.219,-11.542 0.307,-11.601 0.366,-11.688 0.386,-11.792 0.386,-12.091 0.366,-12.195 0.34,-12.232 0.34,-12.529 0.355,-12.532 0.442,-12.591 0.501,-12.678 0.522,-12.782 0.522,-13.402 0.501,-13.505 0.442,-13.592 0.355,-13.651 0.252,-13.672 -0.368,-13.672 -0.472,-13.651 -0.559,-13.592 -0.618,-13.505 -0.639,-13.402 -0.639,-12.782 -0.618,-12.678 -0.559,-12.591 -0.472,-12.532 -0.47,-12.532 -0.47,-12.252 -0.509,-12.195 -0.529,-12.091 -0.529,-11.792 -0.509,-11.688 -0.45,-11.601 -0.362,-11.542 -0.259,-11.521 0.116,-11.521
  pour cut-out: 0.705,-6.302 0.792,-6.361 0.851,-6.448 0.872,-6.552 0.872,-7.151 0.851,-7.255 0.792,-7.342 0.705,-7.401 0.697,-7.403 0.697,-7.793 0.704,-7.803 0.724,-7.907 0.724,-8.176 0.704,-8.28 0.645,-8.367 0.557,-8.426 0.454,-8.447 0.293,-8.447 0.292,-8.447 0.291,-8.447 0.29,-8.447 0.129,-8.447 0.026,-8.426 -0.062,-8.367 -0.121,-8.28 -0.141,-8.176 -0.141,-7.907 -0.121,-7.803 -0.114,-7.793 -0.114,-7.403 -0.122,-7.401 -0.209,-7.342 -0.268,-7.255 -0.289,-7.151 -0.289,-6.552 -0.268,-6.448 -0.209,-6.361 -0.122,-6.302 -0.018,-6.281 0.601,-6.281
  pour cut-out: -1.767,0.017 ccw(c-0.017,0.017) -0.017,-1.733 ccw(c-0.017,0.017) 1.733,0.017 ccw(c-0.017,0.017) -0.017,1.767 ccw(c-0.017,0.017)
Int1 (GND):
  pour cut-out: -1.758,0.008 ccw(c-0.008,0.008) -0.008,-1.742 ccw(c-0.008,0.008) 1.742,0.008 ccw(c-0.008,0.008) -0.008,1.758 ccw(c-0.008,0.008)
Int2 (PWR):
  pour cut-out: -1.767,0.017 ccw(c-0.017,0.017) -0.017,-1.733 ccw(c-0.017,0.017) 1.733,0.017 ccw(c-0.017,0.017) -0.017,1.767 ccw(c-0.017,0.017)
Bottom Layer:
  pour cut-out: -1.508,0.008 ccw(c-0.008,0.008) -0.008,-1.492 ccw(c-0.008,0.008) 1.492,0.008 ccw(c-0.008,0.008) -0.008,1.508 ccw(c-0.008,0.008)

## Silkscreen, mask and mechanical layers (free items; w line width, h text height)
Top Overlay:
  text "Micron-GNSS / Shodan (Tula, Russia) / https://ampnuts.com" at -14.865,24.803 h2.7
  text "GNSS L1 Active antenna /  / GLONASS, BeiDou, GPS, Galileo / BPF 1559MHz....1606MHz" at -24.72,-21.554 h2.7 r90
Top Solder:
  rectangle: -7.658,-23.891 7.592,-21.942
  rectangle: -2.808,-21.042 2.542,-18.992
Mechanical 1:
  circle w0.1: c-0.008,0.008 r1.5